# EAGLE board CT_schematic (EAGLE 7.6.0)

Size 100 x 80 mm. Coordinates in mm from the lower left corner, seen from the top.
Outline: 0,0 100,0 100,80 0,80 0,0
Copper layers (1*16): Top 0.035mm / dielectric 1.5mm / Bottom 0.035mm
Design rules "default": minimum track width 10mil, minimum drill 24mil, track to track 8mil, track to pad 8mil, pad to pad 8mil, via to via 8mil, smd to smd 8mil, copper to edge 40mil, drill to drill 8mil, minimum pad ring 10mil, minimum via ring 8mil, stop-mask expansion 4mil, vias tented up to drill 0mil, thermal gap 10mil

## Footprints (pad centres in the part's own frame; a part is rotated, then mirrored left to right if it is on the bottom)
C0603 = smd 0.8 x 0.8: 1 -0.762,0; 2 0.762,0
C0402 = smd 0.5 x 0.5: 1 -0.508,0; 2 0.508,0
C1210 = smd 1.2 x 2.5: 1 -1.524,0; 2 1.524,0
EXV-9H = smd 3.505 x 1.676: 1 -2.857,0; 2 2.857,0
L0603 = smd 0.8 x 0.8: 1 -0.762,0; 2 0.762,0
PJ-037B_PACKAGE = drill 3.7 square: 1 12,0 | drill 3.2 square: 2 6,0
R0603 = smd 0.8 x 0.8: 1 -0.762,0; 2 0.762,0
UFQFPN32 = smd 0.6 x 0.3: 1 -2.35,1.75; 2 -2.35,1.25; 3 -2.35,0.75; 4 -2.35,0.25; 5 -2.35,-0.25; 6 -2.35,-0.75; 7 -2.35,-1.25; 8 -2.35,-1.75; 17 2.35,-1.75; 18 2.35,-1.25; 19 2.35,-0.75; 20 2.35,-0.25; 21 2.35,0.25; 22 2.35,0.75; 23 2.35,1.25; 24 2.35,1.75 | smd 0.3 x 0.6: 9 -1.75,-2.35; 10 -1.25,-2.35; 11 -0.75,-2.35; 12 -0.25,-2.35; 13 0.25,-2.35; 14 0.75,-2.35; 15 1.25,-2.35; 16 1.75,-2.35; 25 1.75,2.35; 26 1.25,2.35; 27 0.75,2.35; 28 0.25,2.35; 29 -0.25,2.35; 30 -0.75,2.35; 31 -1.25,2.35; 32 -1.75,2.35 | smd 3.45 x 3.45: EPAD 0,0
ASFL1 = smd 1.7 x 1.5: 1 -1.27,-1.1; 2 1.27,-1.1; 3 1.27,1.1; 4 -1.27,1.1
WSON-8 = smd 0.3 x 0.6: 1 -0.75,0; 2 0.05,0; 3 0.85,0; 4 1.65,0; 5 1.65,3.8; 6 0.85,3.8; 7 0.05,3.8; 8 -0.75,3.8 | smd 3 x 2.6: PAD 0.45,1.9
SON-6 = smd 0.55 x 0.3: 1 -0.355,0.5 | smd 0.52 x 0.3: 2 -0.37,0; 3 -0.37,-0.5; 4 0.37,-0.5; 5 0.37,0; 6 0.37,0.5
SW_4-1437565-2 = smd 1.4 x 2.1: 1 -2.23,4.55; 2 -2.23,-4.55; 3 2.23,4.55; 4 2.23,-4.55
LGM67K-G1J2-24-Z = smd 0.8 x 1.4: A -2,0; C 0,0
NC7SZ125M5X = smd 1.3 x 0.7: 1 -1.3,0.95; 2 -1.3,0; 3 -1.3,-0.95; 4 1.3,-0.95; 5 1.3,0.95
DUMMY_PACKAGE_74 = drill 0.3: 1 0,-1; 2 1.5,-1

## Placement (x,y rotation side)
C1  1e-07  [C0603]  -43.18,43.18 0 top  (outside the outline)
C2  1e-07  [C0603]  -46.99,43.18 0 top  (outside the outline)
C3  4.7e-06  [C0603]  -39.37,43.18 0 top  (outside the outline)
C4  1e-08  [C0603]  -50.8,43.18 0 top  (outside the outline)
C5  1e-08  [C0603]  -15.24,48.26 0 top  (outside the outline)
C6  1e-06  [C0603]  -19.05,48.26 0 top  (outside the outline)
C7  1e-08  [C0402]  -49.53,48.26 0 top  (outside the outline)
C8  1e-08  [C0402]  -53.34,48.26 0 top  (outside the outline)
C9  1e-05  [C1210]  -29.21,36.83 0 top  (outside the outline)
C10  1e-05  [C1210]  -35.56,36.83 0 top  (outside the outline)
C11  1e-07  [C0402]  -15.24,53.34 0 top  (outside the outline)
C12  0.0001  [EXV-9H]  -35.56,27.94 0 top  (outside the outline)
C13  0.0001  [EXV-9H]  -46.99,27.94 0 top  (outside the outline)
C14  1e-08  [C0402]  -19.05,53.34 0 top  (outside the outline)
F1  240.0  [L0603]  -22.86,48.26 0 top  (outside the outline)
J1  PJ-037B  [PJ-037B_PACKAGE]  -27.94,7.62 0 top  (outside the outline)
R1  10000.0  [R0603]  -20.32,43.18 0 top  (outside the outline)
R2  1000.0  [R0603]  -26.67,48.26 0 top  (outside the outline)
R3  1600.5  [R0603]  -30.48,48.26 0 top  (outside the outline)
R4  4700.0  [R0603]  -34.29,48.26 0 top  (outside the outline)
R5  10000.0  [R0603]  -25.4,43.18 0 top  (outside the outline)
R6  100000.0  [R0603]  -46.99,35.56 0 top  (outside the outline)
R7  2231.0  [R0603]  -38.1,48.26 0 top  (outside the outline)
R8  1000.0  [R0603]  -41.91,48.26 0 top  (outside the outline)
R9  10000.0  [R0603]  -30.48,43.18 0 top  (outside the outline)
R10  10000.0  [R0603]  -35.56,43.18 0 top  (outside the outline)
R11  9100.0  [R0603]  -45.72,48.26 0 top  (outside the outline)
R12  680000.0  [R0603]  -52.07,35.56 0 top  (outside the outline)
R13  120000.0  [R0603]  -15.24,43.18 0 top  (outside the outline)
U1  stm32f051k8u7  [UFQFPN32]  -22.86,19.05 0 top  (outside the outline)
U2  ASFL1-25MHZ-NCS  [ASFL1]  -26.67,29.21 0 top  (outside the outline)
U3  LP3878SDX-ADJ/NOPB  [WSON-8]  -43.18,17.78 0 top  (outside the outline)
U4  TPS3895ADRYR  [SON-6]  -26.67,52.07 0 top  (outside the outline)
U5  4-1437565-2  [SW_4-1437565-2]  -44.45,6.35 0 top  (outside the outline)
U6  Q65110A2395  [LGM67K-G1J2-24-Z]  -17.78,36.83 0 top  (outside the outline)
U7  nc7sz125m5x  [NC7SZ125M5X]  -40.64,35.56 0 top  (outside the outline)
U8  Dummy  [DUMMY_PACKAGE_74]  -24.13,53.34 0 top  (outside the outline)

## Library data of the parts
C1-C14 F1 J1 R1-R13 U1-U8 = circuit_tree

## Nets
CLK_U1_2: U1.2 U2.3
GND: C1.2 C2.2 C3.2 C4.2 C5.2 C6.2 C7.2 C8.2 C9.2 C10.2 C11.2 C12.2 C13.2 C14.2 J1.2 R2.2 R5.2 R8.2 R11.2 R13.2 U1.EPAD U2.2 U3.3 U3.PAD U4.2 U6.C U7.1 U7.3 U8.1
NET_U1_4: R4.1 U1.4 U7.4
NET_U1_5: C4.1 C5.1 C6.1 F1.1 U1.5
NET_U1_30: R3.1 U1.30 U6.A
NET_U1_31: R5.1 U1.31
NET_U1_32: R1.1 U1.32 U5.3 U5.4
NET_U3_1: C8.1 U3.1
NET_U3_6: R7.2 R8.1 U3.6
NET_U3_8: R6.1 U3.8
NET_U4_1: R10.1 R11.1 U4.1
NET_U4_3: R12.2 R13.1 U4.3
NET_U4_4: R9.1 U4.4 U7.2
NET_U5_1: R2.1 U5.1 U5.2
PROC_DAC1_OUT1: U1.10 U8.2
VCC_S1_11V9: C9.1 C12.1 C13.1 J1.1 R6.2 U3.4
VCC_TIER1_3V3: C1.1 C2.1 C3.1 C7.1 C10.1 C11.1 C14.1 F1.2 R1.2 R3.2 R4.2 R7.1 R9.2 R10.2 R12.1 U1.1 U1.17 U2.4 U3.5 U4.6 U7.5

## Tracks (layer width: path | path; a pad name or v marks a point on that pad's centre or on a via)
CLK_U1_2  (1 unrouted)
GND  (28 unrouted)
NET_U1_4  (2 unrouted)
NET_U1_5  (4 unrouted)
NET_U1_30  (2 unrouted)
NET_U1_31  (1 unrouted)
NET_U1_32  (3 unrouted)
NET_U3_1  (1 unrouted)
NET_U3_6  (2 unrouted)
NET_U3_8  (1 unrouted)
NET_U4_1  (2 unrouted)
NET_U4_3  (2 unrouted)
NET_U4_4  (2 unrouted)
NET_U5_1  (2 unrouted)
PROC_DAC1_OUT1  (1 unrouted)
VCC_S1_11V9  (5 unrouted)
VCC_TIER1_3V3  (20 unrouted)